# Altium PCB PCB_PCB恒温加热台 copy_2022-02-27.pcbdoc
Units mil, origin at the board's own origin, x right, y up, seen from the top; angles counter-clockwise.
Board outline 3955 x 4270 mil, 2 copper layers (Top Layer, Bottom Layer); 61 components, 53 nets, 212 pads, 100 vias.
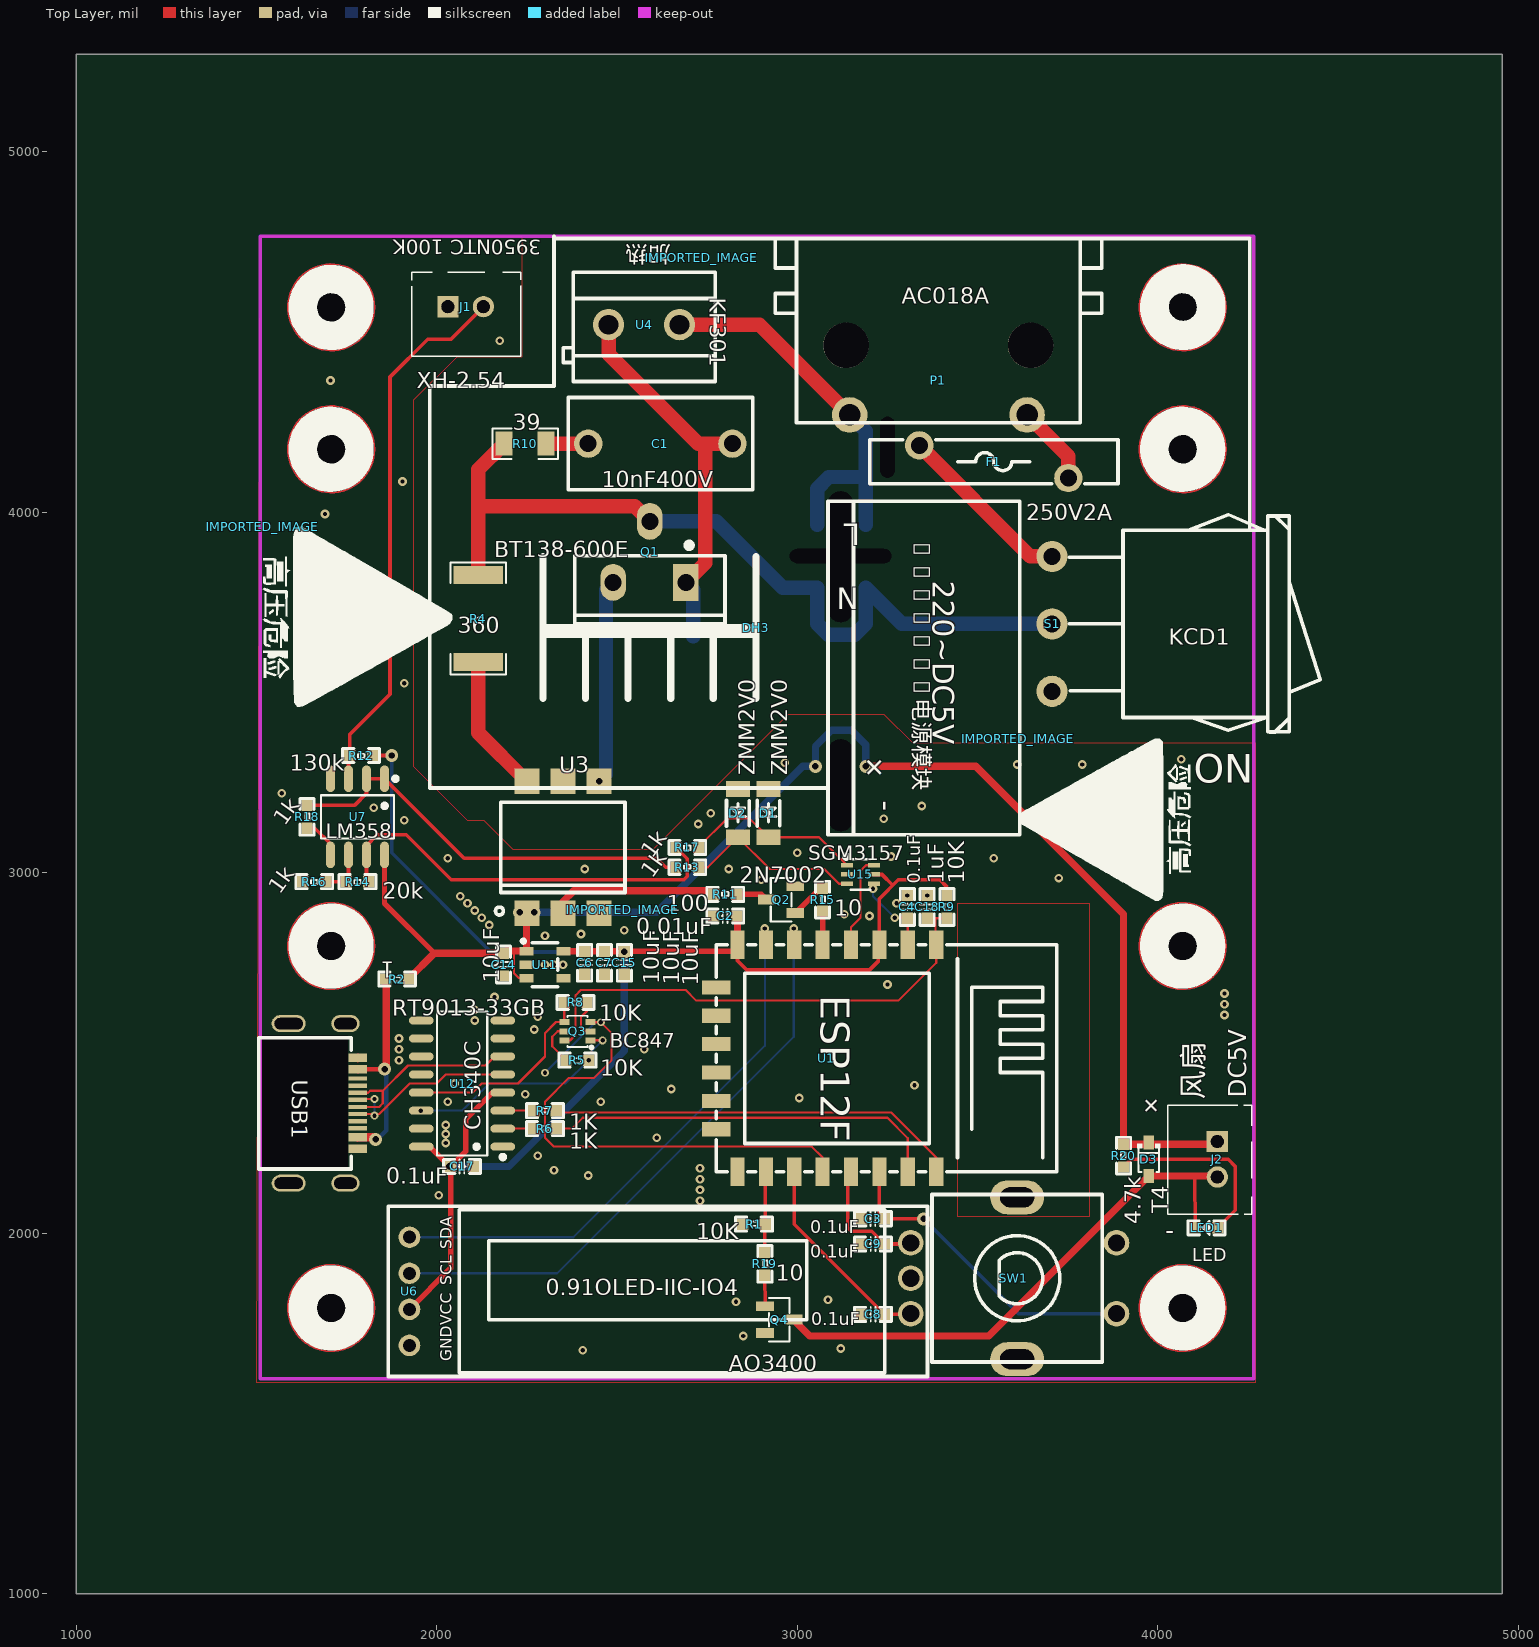
[diagram p0: Top Layer view]
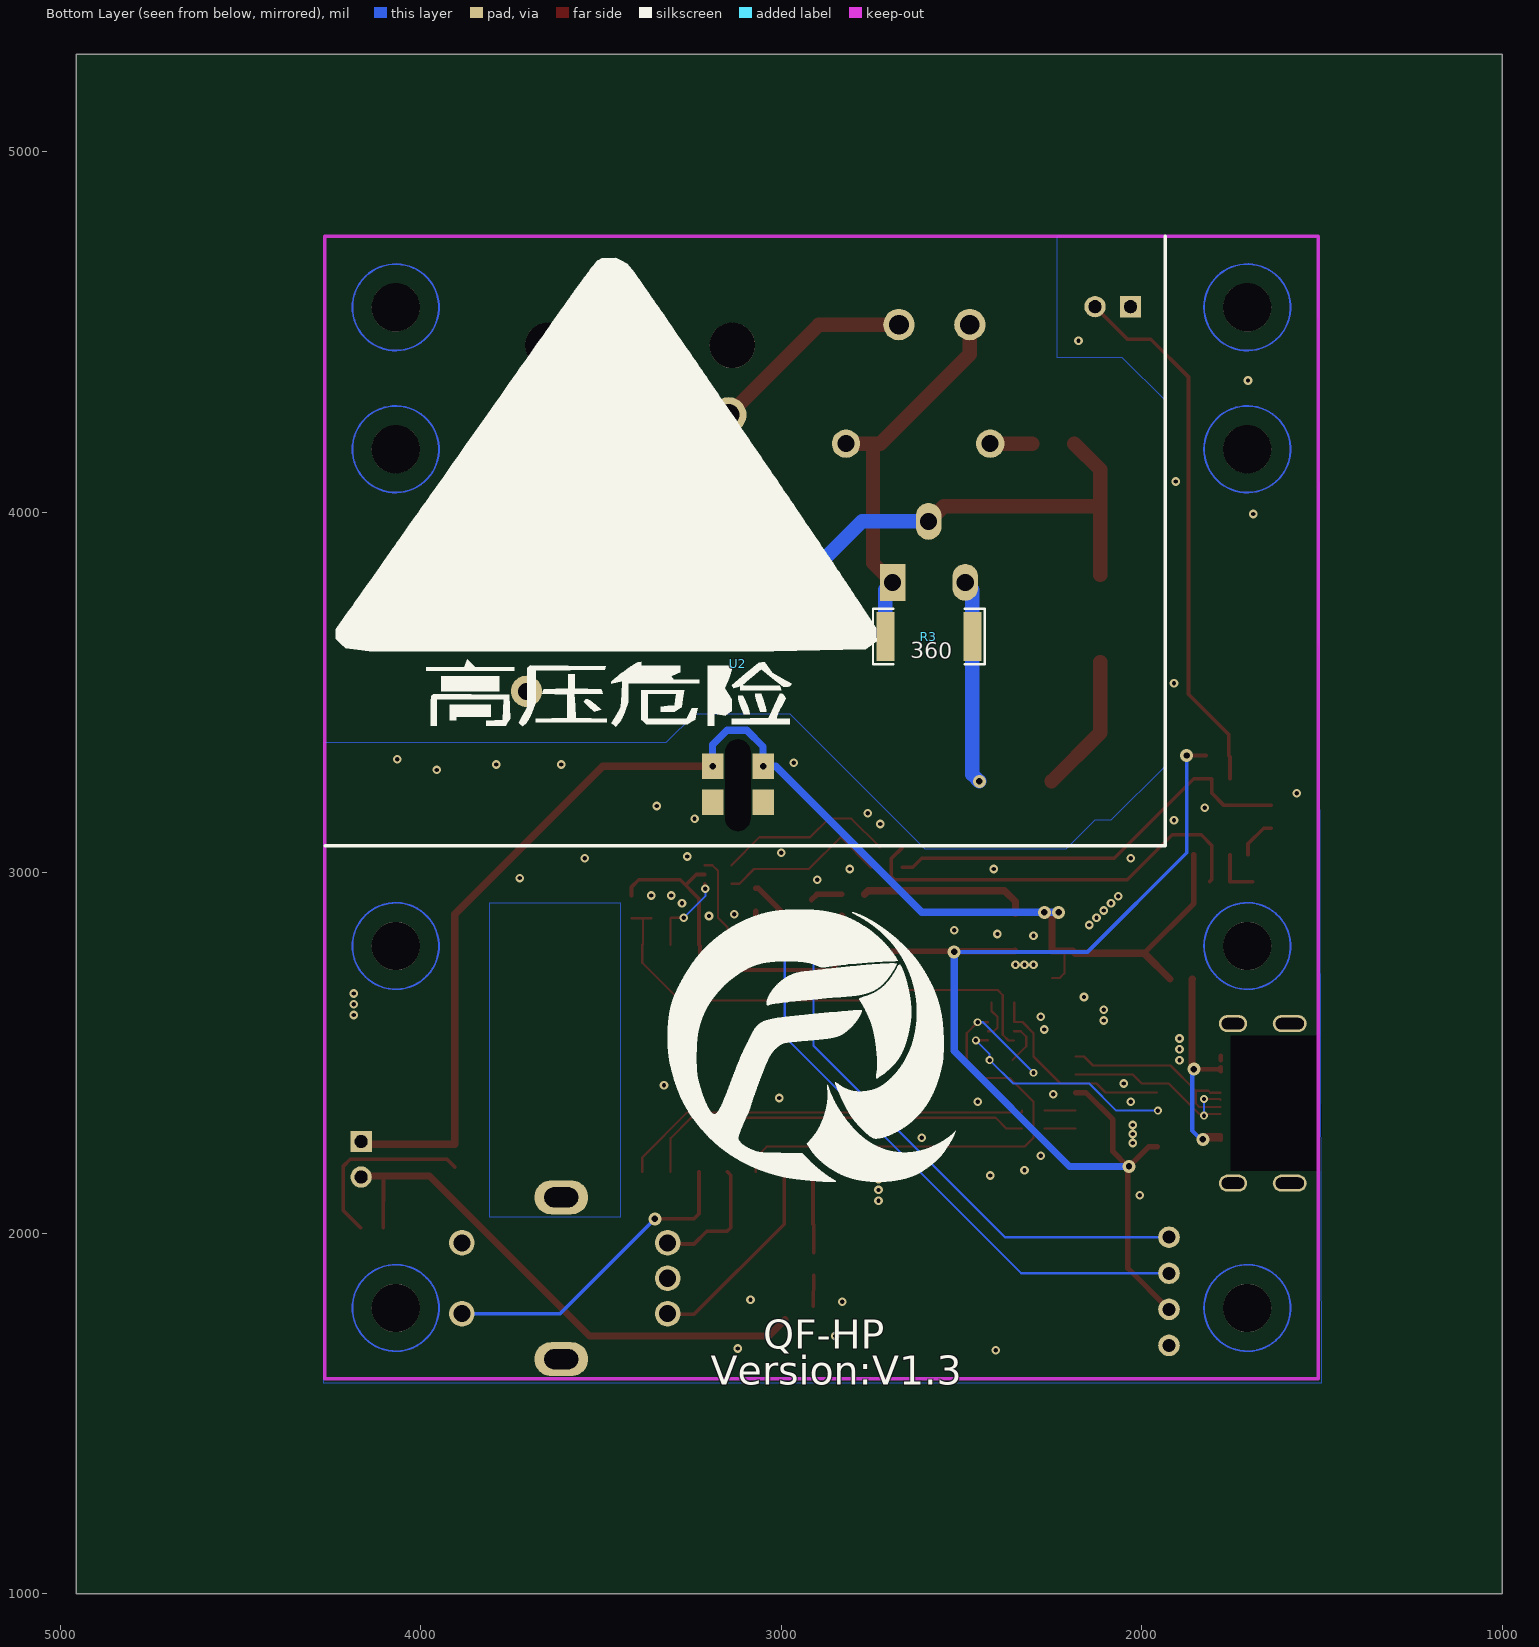
[diagram p1: Bottom Layer view, seen from below]

## Layer stack, top to bottom
Top Layer: signal copper (thickness not stored)
Dielectric: dielectric 12.6, FR-4, Dk 4.8
Bottom Layer: signal copper (thickness not stored)

## Board outline
4955,1000 1000,1000 1000,5270 4955,5270
cut-out: 3270,4245 3270,4115 cw(c3250,4115) 3230,4115 3230,4245 cw(c3250,4245) 3270,4245
cut-out: 2999,3898 3241,3898 cw(c3241,3878) 3241,3858 2999,3858 cw(c2999,3878) 2999,3898

## Components (designator, comment, footprint, x,y, rotation, side; value= is the part's Value field where it differs from the comment)
C1 "10nF400V" CAP-TH_L13.0-W6.5-P10.00-D1.2 2620,4190 r180 top
C2 "0.01uF" "CAP 0603" 2800,2880 r0 top
C3 "0.1uF" "CAP 0603" 3210,2040 r0 top
C4 "0.1uF" "CAP 0603" 3305,2905 r270 top
C6 "10uF" "CAP 0603" 2410,2750 r270 top
C7 "10uF" "CAP 0603" 2465,2750 r270 top
C8 "0.1uF" "CAP 0603" 3210,1775 r180 top
C9 "0.1uF" "CAP 0603" 3210,1970 r180 top
C14 "10uF" "CAP 0603" 2185.02,2744.96 r270 top
C15 "10uF" "CAP 0603" 2520,2750 r270 top
C17 "0.1uF" "CAP 0603" 2070,2185 r0 top
C18 "1uF" "CAP 0603" 3360,2905 r90 top
D1 "ZMM2V0" LL-34_L3.5-W1.5-RD 2920,3165 r90 top
D2 "ZMM2V0" LL-34_L3.5-W1.5-RD 2835,3165 r90 top
D3 "T4" SOD-323_L1.8-W1.3-LS2.5-RD 3975,2205 r270 top
DH3 "散热片无针" 散热片无针 2885,3680 r180 top
F1 "250V 2A 脚距10自恢复" FUSE-TH_L17.5-W3.1-P10.50-D0.8-S2.30 3545,4140 r180 top
IMPORTED_IMAGE "IMPORTED_IMAGE" IMPORTED_IMAGE 2515.11,2897.79 r0 top
IMPORTED_IMAGE "IMPORTED_IMAGE" IMPORTED_IMAGE 2735,4705 r0 top
IMPORTED_IMAGE "IMPORTED_IMAGE" IMPORTED_IMAGE 1517.6,3959.41 r0 top
IMPORTED_IMAGE "IMPORTED_IMAGE" IMPORTED_IMAGE 3612.68,3371.77 r0 top
J1 "XH-2.54" XH-2.54-TH-2P 2080,4570 r180 top
J2 "XH-2.54" XH-2.54-TH-2P 4165,2205 r90 top
LED1 "led-0603" LED-0603 4135,2015 r0 top
P1 "AC018A 8字电源侧插" 8字电源座侧插 3785,4760 r270 top
Q1 "BT138-600E" TO-220-3_L10.0-W4.5-P2.54-L 2590,3805 r180 top
Q2 "2N7002" SOT-23-3_L2.9-W1.3-P1.90-LS2.4-BR 2955,2925 r0 top
Q3 "BC847BS,115" SOT-363_L2.0-W1.3-P0.65-LS2.1-TL 2390,2560 r180 top
Q4 "AO3400" SOT-23-3_L2.9-W1.3-P1.90-LS2.4-BR 2950,1760 r180 top
R1 "10K" RES-0603 2880,2025 r180 top
R2 "1" RES-0603 1890,2705 r0 top
R3 "360" R2512#1 2590,3655 r0 bottom
R4 "360" R2512#2 2115,3705 r270 top
R5 "10K" RES-0603 2390,2480 r0 top
R6 "1K" RES-0603 2300,2290 r180 top
R7 "1K" RES-0603 2300,2340 r180 top
R8 "10K" RES-0603 2385,2640 r0 top
R9 "10K" RES-0603 3415,2905 r270 top
R10 "39" R1206 2245,4190 r180 top
R11 "100" RES-0603 2800,2940 r180 top
R12 "130k" RES-0603 1790,3325 r0 top
R13 "1k" RES-0603 2695,3015 r180 top
R14 "20k" RES-0603 1780,2975 r0 top
R15 "10" RES-0603 3070,2925 r90 top
R16 "1k" RES-0603 1660,2975 r0 top
R17 "1k" RES-0603 2695,3070 r0 top
R18 "1k" RES-0603 1640,3155 r90 top
R19 "10" RES-0603 2910,1915 r90 top
R20 "4.7k" RES-0603 3905,2215 r270 top
S1 "KCD1弯脚" 船型开关15-10 4305,3950 r270 top
SW1 "EC11" SW-TH_5P-L11.8-W12.0-P2.50-LS14.5 3600,1875 r270 top
U1 "ESP-12F(ESP8266MOD)" WIFIM-SMD_ESP-12F-ESP8266MOD 3080,2485 r180 top
U2 "5V700mA电源模块" 5V700MA 3085,4030 r0 top
U3 "MOC3041SR2M" SOP-6_L8.5-W6.4-P2.54-LS9.2-BL 2350,3070 r0 top
U4 "KF301-5.0-2P" CONN-TH_P5.00_KF301-5.0-2P 2575,4520 r180 top
U6 "0.91OLED-IIC-IO4" 0.91-OLED-IIC-12832 1865,2075 r0 top
U7 "LM358" SOP-8_L4.9-W3.9-P1.27-LS6.0-BL 1780,3155 r180 top
U11 "RT9013-33GB" SOT-23-5_L3.0-W1.7-P0.95-LS2.8-BR 2300,2745 r180 top
U12 "CH340C" SOP-16_L10.0-W3.9-P1.27-LS6.0-BL 2070,2415 r90 top
U15 "SGM3157" SC-70-6_L2.2-W1.3-P0.65-LS2.2-BR 3175,2995 r180 top
USB1 "TYPE-C-16M-005" USB-C-SMD_TYPE-C-16M-005 1685,2360 r270 top

## Footprints (in the part's own frame and the unit in brackets; to place one, negate y for a bottom-side part, rotate by r counter-clockwise, add the part's x,y. Pads: shape width x height; smd on the part's side, far side on the other; paste and mask are expansions set on the pad)
0.91-OLED-IIC-12832 [mil]
  round 60 hole 36: 1(59.06,-86.22) 2(59.06,-186.22) 3(59.06,-286.22) 4(59.06,-386.22)
  silkscreen extent 0,-472 1496,0
5V700MA [mil]
  rect 60x118.11 smd far side: 1(-30,-65) 1(105,-65) 2(-30,-240) 2(105,-240)
  rect 60x70.87 smd far side: 3(-35,-835) 3(105,-835) 4(-35,-735) 4(105,-735)
  Multi-Layer board cut-out: 70.43,-7.5 70.43,-300 66.92,-315.37 57.09,-327.7 42.88,-334.54 27.12,-334.54 12.91,-327.7 3.08,-315.37 -0.43,-300 -0.43,-300 -0.43,-7.5 3.08,7.87 12.91,20.2 27.12,27.04 42.88,27.04 57.09,20.2 66.92,7.87 70.43,-7.5 70.43,-7.5
  Multi-Layer board cut-out: -0.43,-880 -0.43,-695 3.08,-679.63 12.91,-667.3 27.12,-660.46 42.88,-660.46 57.09,-667.3 66.92,-679.63 70.43,-695 70.43,-695 70.43,-880 66.92,-895.37 57.09,-907.7 42.88,-914.54 27.12,-914.54 12.91,-907.7 3.08,-895.37 -0.43,-880 -0.43,-880
  silkscreen extent 0,-925 532,0
8字电源座侧插 [mm]
  round 2.5 hole 1.5: 1(12.45,-3.75) 2(12.45,-16.25)
  round 3.2 hole 3.2 unplated: ""(7.55,-3.5) ""(7.55,-16.5)
  silkscreen extent 0,-21.5 13,1.5
"CAP 0603" [mm]
  rect 0.8x0.8 smd: 1(-0.8,0) 2(0.8,0)
  silkscreen extent -1.3,-0.51 1.3,0.51
CAP-TH_L13.0-W6.5-P10.00-D1.2 [mm]
  round 2 hole 1.2: 1(-5.08,0) 2(5.08,0)
  silkscreen extent -6.5,-3.25 6.5,3.25
CONN-TH_P5.00_KF301-5.0-2P [mm]
  round 2.2 hole 1.4: 1(-2.5,0) 2(2.5,0)
  silkscreen extent -5,-3.7 5.71,4
FUSE-TH_L17.5-W3.1-P10.50-D0.8-S2.30 [mm]
  round 2 hole 1.2: 1(-5.25,1.15) 2(5.25,-1.15)
  silkscreen extent -8.75,-1.55 8.75,1.55
IMPORTED_IMAGE [mil]
LED-0603 [mm]
  rect 0.8x0.8 smd: 1(-0.8,0) 2(0.8,0)
  silkscreen extent -1.3,-0.5 1.3,0.5
LL-34_L3.5-W1.5-RD [mm]
  rect 1.1x1.7 smd: 1(-1.7,0) 2(1.7,0)
  silkscreen extent -0.9,-0.8 0.9,0.8
R1206 [mil]
  rect 47.54x66.97 smd: 1(-58.22,0) 2(58.22,0)
  silkscreen extent -91,-42 91,42
R2512#1 [mil]
  rect 50.49x136.06 smd: 1(120.72,0) 2(-120.72,0)
  silkscreen extent -155,-77 155,77
R2512#2 [mil]
  rect 50.49x136.06 smd: 1(-120.72,0) 2(120.72,0)
  silkscreen extent -155,-77 155,77
RES-0603 [mm]
  rect 0.8x0.8 smd: 1(-0.8,0) 2(0.8,0)
  silkscreen extent -1.3,-0.5 1.3,0.5
SC-70-6_L2.2-W1.3-P0.65-LS2.2-BR [mm]
  rect 0.841x0.315 smd: 1(0.945,-0.65) 2(0.945,0) 3(0.945,0.65) 4(-0.945,0.65) 5(-0.945,0) 6(-0.945,-0.65)
  silkscreen extent -0.7,-1.41 1.15,1.08
SOD-323_L1.8-W1.3-LS2.5-RD [mm]
  rect 1x0.75 smd: 1(-1.173,0) 2(1.173,0)
  silkscreen extent -1.08,-0.8 0.9,0.8
SOP-6_L8.5-W6.4-P2.54-LS9.2-BL [mil]
  rect 70.1x70.87 smd: 1(-100,-183) 2(0,-183) 3(100,-183) 4(100,183) 5(0,183) 6(-100,183)
  silkscreen extent -187,-187 172,125
SOP-8_L4.9-W3.9-P1.27-LS6.0-BL [mm]
  oval 0.63x1.865 smd: 1(-1.905,-2.682) 2(-0.635,-2.682) 3(0.635,-2.682) 4(1.905,-2.682) 5(1.905,2.682) 6(0.635,2.682) 7(-0.635,2.682) 8(-1.905,2.682)
  silkscreen extent -2.82,-2.83 2.58,1.52
SOP-16_L10.0-W3.9-P1.27-LS6.0-BL [mm]
  oval 0.56x1.745 smd: 1(-4.445,-2.873) 2(-3.175,-2.873) 3(-1.905,-2.873) 4(-0.635,-2.873) 5(0.635,-2.873) 6(1.905,-2.873) 7(3.175,-2.873) 8(4.445,-2.873) 9(4.445,2.873) 10(3.175,2.873) 11(1.905,2.873) 12(0.635,2.873) 13(-0.635,2.873) 14(-1.905,2.873) 15(-3.175,2.873) 16(-4.445,2.873)
  silkscreen extent -5.33,-3.02 5.08,1.77
SOT-23-3_L2.9-W1.3-P1.90-LS2.4-BR [mm]
  rect 1.25x0.7 smd: 1(1,-0.95) 2(1,0.95) 3(-1,0)
  silkscreen extent -0.73,-1.53 0.73,1.53
SOT-23-5_L3.0-W1.7-P0.95-LS2.8-BR [mm]
  rect 1x0.6 smd: 1(1.3,-0.95) 2(1.3,0) 3(1.3,0.95) 4(-1.3,0.95) 5(-1.3,-0.95)
  silkscreen extent -0.9,-1.78 1.65,1.55
SOT-363_L2.0-W1.3-P0.65-LS2.1-TL [mm]
  rect 0.7x0.42 smd: 1(-0.92,0.65) 2(-0.92,0) 3(-0.92,-0.65) 4(0.92,-0.65) 5(0.92,0) 6(0.92,0.65)
  silkscreen extent -1.09,-1.1 0.7,1.24
SW-TH_5P-L11.8-W12.0-P2.50-LS14.5 [mm]
  round 1.8 hole 1.2: 1(-2.5,-7.25) 2(0,-7.25) 3(2.5,-7.25) 4(-2.5,7.25) 5(2.5,7.25)
  oval 2.4x3.8 hole 1.4 slot 2.4 at 90 deg: 7(-5.7,0.25) 8(5.7,0.25)
  silkscreen extent -5.9,-5.75 5.9,6.25
TO-220-3_L10.0-W4.5-P2.54-L [mm]
  rect 1.8x2.6 hole 1.2: 1(-2.56,0.005)
  oval 1.8x2.6 hole 1.2: 2(-0.02,-4.305) 3(2.56,-0.005)
  silkscreen extent -5.32,-2.82 5.28,2.9
USB-C-SMD_TYPE-C-16M-005 [mm]
  oval 1.2x2 hole 0.8 slot 1.6 at 90 deg: 17(5.62,1.563) 20(-5.62,1.563)
  oval 1.2x2.4 hole 0.8 slot 2 at 90 deg: 18(5.62,-2.437) 19(-5.62,-2.437)
  rect 0.3x1.3 smd: A1(-3.35,2.438) A4(-2.55,2.438) A5(-1.25,2.438) A6(-0.25,2.438) A7(0.25,2.438) A8(1.25,2.438) A9(2.55,2.438) A12(3.35,2.438) B1(3.05,2.438) B4(2.25,2.438) B5(1.75,2.438) B6(0.75,2.438) B7(-0.75,2.438) B8(-1.75,2.438) B9(-2.25,2.438) B12(-3.05,2.438)
  Keep-Out Layer lines w0.254: 4.7,-4.45 -4.65,-4.45
  Multi-Layer board cut-out: -4.75,-4.612 -4.75,1.738 4.75,1.738 4.75,-4.662
  silkscreen extent -4.62,-4.54 4.62,1.96
WIFIM-SMD_ESP-12F-ESP8266MOD [mm]
  rect 1x2 smd: 1(-7.751,-8.002) 2(-5.751,-8.002) 3(-3.751,-8.002) 4(-1.751,-8.002) 5(0.249,-8.002) 6(2.249,-8.002) 7(4.249,-8.002) 8(6.249,-8.001) 9(6.249,7.999) 10(4.249,8) 11(2.249,8.002) 12(0.249,8.001) 13(-1.751,8) 14(-3.751,8.001) 15(-5.751,8) 16(-7.751,8.001)
  rect 2x1 smd: 17(7.75,-5) 18(7.749,-3.002) 19(7.749,-1.003) 20(7.749,0.998) 21(7.749,2.997) 22(7.75,4.997)
  silkscreen extent -16.25,-8 7.75,8
XH-2.54-TH-2P [mil]
  round 59.06 hole 35.44 slot 35.64 at 0 deg: 1(-49.22,0)
  rect 59.05x59.05 hole 35.44 slot 35.64 at 0 deg: 2(49.22,0)
  silkscreen extent -152,-95 149,138
散热片无针 [mil]
  silkscreen extent 0,-197 590,197
船型开关15-10 [mm]
  round 2.2 hole 1.2: 1(1.85,-15.2) 2(6.6,-15.2) 3(11.35,-15.2)
  silkscreen extent -1.1,-13.97 14.22,3.68

## Free pads (board coordinates)
  round 133.86 hole 133.86 unplated: ""(1706.85,1792.56) ""(1706.85,2796.5) ""(1706.85,4174.45) ""(1706.85,4568.15) ""(4069.06,1792.56) ""(4069.06,2796.5) ""(4069.06,4174.45) ""(4069.06,4568.15)

## Via types
v1: diameter 24, hole 12, Top Layer to Bottom Layer, tented both sides, 82 vias
v2: diameter 36, hole 18, Top Layer to Bottom Layer, tented both sides, 11 vias
v3: diameter 22, hole 12, Top Layer to Bottom Layer, tented both sides, 7 vias

## Nets (pads, with @x,y where several pads share a name; then routed paths per layer and width w, separated by ;. In a path a pad name is that pad's centre, name@x,y a point inside that pad or via, vN(x,y) a via of type N, cw(c..) or ccw(c..) an arc to the next point about the centre after c; other vN are vias at no path point)
3.3V: C2.2 C6.1 C7.1 C15.1 C17.1 R9.1 R12.2 U1.3 U1.8 U6.3 U11.5 U12.4 U12.16 U15.5 | length 4308.2
  Top Layer w10: R12.2 v2(1875,3325) ; U1.8 2834,2756 2860,2730 3200,2730 3225,2755 3225,2797.4 U1.3 3227.7,2927.7 3280,2980 3395,2980 3415,2960 R9.1 ; U15.5 3235.06,2995 3265.03,2965.03
  Top Layer w15: U6.3 2038.5,1903.22 C17.1 2080,2226.5 2080,2315 2155,2390 U12.4 ; U12.16 1980,2240 v2(2035,2185) ; C15.1 2815.47,2781.5 U1.8
  Top Layer w20: U11.5 C15.1 ; C2.2 2833.96,2877.54 U1.8
  Bottom Layer w10: v2(1875,3325) 1875,3055 2150,2780 v2(2520,2780)
  Bottom Layer w20: v2(2035,2185) 2200,2185 2520,2505 v2(2520,2780)
+5V: C14.1 D3.1 J2.2 R2.2 R20.1 U2.4 U3.1 U7.8 U11.1 U11.3 | length 3984.4
  Top Layer w6: 2214.34,2782.4 2214.34,2720.66 2227.4,2707.6 U11.3
  Top Layer w15: U7.8 1855,2914.4 1993,2776.5
  Top Layer w20: R2.2 1992.95,2776.45 C14.1 ; C14.1 2190.9,2782.4 U11.1 2248.8,2890 v2(2270,2890) ; v2(3190,3295) 3495,3295 3905,2885 R20.1 4157.27,2246.5 J2.2
  Bottom Layer w20: v2(2230,2890) v2(2270,2890) 2610,2890 3015,3295 v2(3050,3295) 3050,3350 3095,3395 3150,3395 3190,3355 v2(3190,3295)
ADC: C4.2 U1.2 U15.4 | length 230.7
  Top Layer w6: v1(3270,2875) 3305,2875 3306.4,2873.6 U1.2
  Top Layer w10: v1(3210,2955) 3212.22,2957.22 U15.4
  Bottom Layer w6: v1(3210,2955) 3210,2935 v1(3270,2875)
ADC0: D2.1 R13.1 U15.3 | length 499
  Top Layer w6: R13.1 2751.93,3015 D2.1 2923.07,3010 3075,3010 3115.59,2969.41 U15.3
ADC1: D1.1 R17.2 U15.1 | length 498.9
  Top Layer w6: R17.2 2726.5,3071.5 2805,3150 2868.07,3150 D1.1 3060.3,3098.07 U15.1
D+: U12.5 USB1.A6 USB1.B6 | length 558.5
  Top Layer w6: USB1.A6 1783.12,2372 v3(1827,2372) ; USB1.B6 1840.5,2330.5 1925,2415 2000,2415 2025,2440 U12.5 U12.5@2165,2440
  Bottom Layer w6: v3(1827,2326) v3(1827,2372)
D-: U12.6 USB1.A7 USB1.B7 | length 551.8
  Top Layer w6: USB1.A7 1840.2,2350.2 1850,2360 1850,2395 ; USB1.B7 1809.5,2389.5 1815,2395 1835,2395 1850,2395 ; U12.6 2160,2490 2135,2465 1920,2465 1850,2395
DTR: Q3.4 R8.1 U12.13 | length 570.5
  Top Layer w6: U12.13 2100,2390 2125,2415 2225,2415 2300,2490 2300,2555 2330.6,2585.6 Q3.4 2353.5,2585.87 R8.1
F1_2: F1.2 S1.1 | length 495.9
  Top Layer w40: F1.2 3646.42,3877.16 S1.1
FAN: R1.1 R19.2 U1.10 | length 224.6
  Top Layer w10: R19.2 2909.99,2023.49 R1.1 2911.5,2168.83 U1.10
GND: C2.1 C3.1 C4.1 C6.2 C7.2 C8.2 C9.2 C14.2 C15.2 C17.2 C18.2 D1.2 D2.2 J1.2 Q2.2 Q4.2 R1.2 R16.1 SW1.2 SW1.4 U1.9 U2.3 U6.4 U7.4 U11.2 U12.1 U15.2 USB1.17 USB1.18 USB1.19 USB1.20 USB1.A1 USB1.A12 USB1.B1 USB1.B12 | length 11.8
  Top Layer w12: USB1.B12 USB1.A1
  other v1: 2405,1675 3120,1680 2850,1715 2830,1810 3085,1815 2730,2090 2005,2105 2730,2120 2730,2150 2420,2160 2325,2175 2730,2180 2280,2215 2025,2250 2610,2265 2025,2275 2025,2300 2030,2365 2455,2365 3005,2375 2245,2385 2650,2400 3325,2410 2050,2415 1895,2480 1895,2510 2575,2510 1895,2540 2270,2565 2105,2590 2280,2600 4185,2605 2105,2620 4185,2635 2160,2655 4185,2665 3250,2690 2300,2745 2325,2745 2350,2745 2300,2825 2400,2830 2520,2840 2145,2855 2125,2875 3200,2880 3130,2885 2105,2895 2085,2915 3275,2915 2065,2935 3305,2936.5 3360,2936.5 2900,2980 3725,2985 2410,3010 2810,3010 2030,3040 3545,3040 3260,3045 3000,3055 2725,3135 1910,3145 3240,3150 2760,3165 1825,3180 3345,3185 1570,3220 3955,3285 3610,3300 3790,3300 2965,3305 4065,3315 1910,3525 1690,3995 1905,4085 1705,4365 2175,4475
IO0: Q3.3 U1.12 | length 1524.9
  Top Layer w6: Q3.3 2426.81,2585 v3(2455,2585) 2485,2555 2485,2480 2435,2430 2365,2430 2300,2365 2300,2265 2325,2240 3040,2240 3070.2,2209.8 U1.12
  Bottom Layer w6: v3(2300,2445) 2440,2585 v3(2455,2585)
L: Q1.2 R4.1 R10.2 S1.2 U2.2 | length 2345.7
  Top Layer w40: R4.1 2115,4118.22 R10.2 ; 2115,4016.34 2548.93,4016.34 Q1.2
  Bottom Layer w40: Q1.2 2775.5,3974.5 2960,3790 3055,3790 3055,3690 3085,3660 3160,3660 3190,3690 3190,3790 3290,3690 3706.41,3690 S1.2
LED1_2: LED1.2 R20.2 | length 517.3
  Top Layer w10: R20.2 3926.5,2205 4195,2205 4215,2185 4215,2063.5 LED1.2
N: P1.2 U2.1 U4.1 | length 1147.3
  Top Layer w40: U4.1 2895.1,4520 P1.2@3140.2,4274.8
  Bottom Layer w40: U2.1@3055,3965 3055,4065 3087.41,4097.41 3190,4097.41 ; P1.2@3140.24,4274.84 3190,4225.08 U2.1@3190,3965
P1_1: F1.1 P1.1 | length 229.6
  Top Layer w40: P1.1@3632.36,4274.84 3751.7,4155.5 F1.1
PWM: R15.1 U1.5 | length 93.5
  Top Layer w15: R15.1 U1.5
Q1_1: C1.1 Q1.1 R3.1 U4.2 | length 1168.6
  Top Layer w40: U4.2 2476.6,4438.4 2725,4190 C1.1 2745,4190 2745,3859 Q1.1
  Bottom Layer w40: Q1.1 2710.72,3784.87 R3.1
Q1_3: Q1.3 R3.2 U3.4 | length 568.4
  Bottom Layer w40: v2(2450,3253) 2469.28,3272.28 R3.2 2469.28,3785.26 Q1.3
Q2_1: Q2.1 R15.2 | length 104.2
  Top Layer w15: Q2.1 3063.27,2956.5 R15.2
Q3_2: Q3.2 R8.2 | length 107.2
  Top Layer w6: R8.2 2416.5,2616.5 2400,2600 2400,2570 2410,2560 Q3.2
Q3_5: Q3.5 R5.1 | length 121
  Top Layer w6: Q3.5 2335,2560 2320,2545 2320,2518.5 R5.1
Q4_1: Q4.1 R19.1 | length 86.1
  Top Layer w10: R19.1 Q4.1
Q4_3: D3.2 J2.1 LED1.1 Q4.3 | length 1523.2
  Top Layer w10: 4102.9,2158.8 LED1.1
  Top Layer w20: Q4.3 3034.37,1715 3531.16,1715 D3.2 4161.94,2158.84 J2.1
R10_1: C1.2 R10.1 | length 116.8
  Top Layer w40: R10.1 C1.2
R11_1: Q2.3 R11.1 | length 90.3
  Top Layer w15: R11.1 2900.64,2939.99 Q2.3
R12_1: J1.1 R12.1 U7.3 | length 1502
  Top Layer w10: U7.3 1755,3321.5 R12.1 1758.5,3383.5 1870,3495 1870,4375 1975,4480 2039.23,4480 J1.1
R13_2: R13.2 R18.2 U7.1 U7.2 | length 1179.7
  Top Layer w10: R18.2 1771.5,3186.5 1805,3220 U7.2 U7.1 2075.6,3040 2610,3040 2635,3015 R13.2
RST: C18.1 Q3.6 R9.2 U1.1 | length 1389.3
  Top Layer w6: Q3.6 2369.4,2534.4 2385,2550 2385,2660 2400,2675 2690,2675 2720,2645 3280,2645 3385.2,2750.2 U1.1@3385.2,2800 ; C18.1 R9.2 ; 3382.89,2873.5 3382.89,2802.27 U1.1
RTS: Q3.1 R5.2 U12.14 | length 629.5
  Top Layer w6: Q3.1 2426.81,2535 v3(2460,2535)
  Bottom Layer w6: v3(1955,2340) 2070,2340 2145,2415 2356.5,2415 v3(2421.5,2480) 2421.5,2496.5 v3(2460,2535)
RXD0: R6.1 U1.15 | length 1104.3
  Top Layer w6: R6.1 2375,2290 2405,2320 3250,2320 3306.4,2263.6 U1.15
S$4044: 
S$4046: 
S$4048: 
S$4055: 
S$4057: 
S$4070: 
S$4080: 
SCL: U1.6 U6.2 | length 1683.3
  Top Layer w6: v1(2990,2845) 2991.44,2843.56 U1.6
  Bottom Layer w6: U6.2 2333.78,1888.78 2990,2545 v1(2990,2845)
SDA: U1.7 U6.1 | length 1577.1
  Top Layer w6: v1(2910,2845) 2912.7,2842.3 U1.7
  Bottom Layer w6: U6.1 2378.78,1988.78 2910,2520 v1(2910,2845)
SW: C3.2 SW1.5 U1.14 | length 888.8
  Top Layer w10: U1.14 3227.66,2053.84 C3.2 v2(3350,2040)
  Bottom Layer w10: v2(3350,2040) 3613.43,1776.57 SW1.5
SWA: C9.1 SW1.1 U1.13 | length 353.3
  Top Layer w10: U1.13 3140,2161.1 3140,2015 3150,2005 3206.5,2005 C9.1 3311.15,1970 SW1.1
SWB: C8.1 SW1.3 U1.11 | length 572.3
  Top Layer w10: U1.11 2991.44,2025.06 C8.1 3313,1775 SW1.3
SWITCH: U1.4 U15.6 | length 259.5
  Top Layer w6: U1.4 3148.9,2848.9 3175,2875 3175,3005 3190.6,3020.6 U15.6
TXD0: R7.1 U1.16 | length 1150.4
  Top Layer w6: R7.1 2331.5,2335 3260,2335 3385.2,2209.8 U1.16@3385.2,2170
U3_2: R11.2 U3.2 | length 468.1
  Top Layer w20: U3.2 2350,2920 2380,2950 2758.5,2950 R11.2
U3_6: R4.2 U3.6 | length 387.2
  Top Layer w40: R4.2 2115,3388 U3.6
U7_5: R18.1 U7.5 | length 113.6
  Top Layer w10: R18.1 1661.5,3123.5 1705,3080 U7.5
U7_6: R14.1 R16.2 U7.6 | length 137.9
  Top Layer w10: R16.2 R14.1 1755,2975 U7.6
U7_7: R14.2 R17.1 U7.7 | length 1154.1
  Top Layer w10: R14.2 1805,2981.51 U7.7 1805,3075 1835,3105 1915,3105 2040,2980 2685,2980 2695,2990 2695,3038.5 R17.1
U12_2: R6.2 U12.2 | length 85.4
  Top Layer w6: U12.2 R6.2
U12_3: R7.2 U12.3 | length 85.4
  Top Layer w6: U12.3 R7.2
VCC: R2.1 USB1.A4 USB1.A9 USB1.B4 USB1.B9 | length 742.3
  Top Layer w12: v2@1823.58,2271.42 USB1.B4 USB1.A9 1781.37,2260 v2@1835,2260 ; USB1.B9 USB1.A4 1786.36,2455 1860,2455 1787.38,2455 USB1.B9
  Top Layer w20: v2(1855,2455) 1860,2460 1860,2705 R2.1
  Bottom Layer w12: v2@1835,2260 1860,2285 v2@1860,2455
  other v2: 1830,2260
pads on no net: P1. S1.3 SW1.7 SW1.8 U1.17 U1.18 U1.19 U1.20 U1.21 U1.22 U3.3 U3.5 U11.4 U12.7 U12.8 U12.9 U12.10 U12.11 U12.12 U12.15 USB1.A5 USB1.A8 USB1.B5 USB1.B8
copper on no net: | length 12063.7
  Top Layer w5: 1826.85,1792.56 ccw(c1706.85,1792.56) 1826.85,1792.56 ; 1826.85,2796.5 ccw(c1706.85,2796.5) 1826.85,2796.5 ; 1826.85,4174.45 ccw(c1706.85,4174.45) 1826.85,4174.45 ; 1826.85,4568.15 ccw(c1706.85,4568.15) 1826.85,4568.15 ; 4189.06,1792.56 ccw(c4069.06,1792.56) 4189.06,1792.56 ; 4189.06,2796.5 ccw(c4069.06,2796.5) 4189.06,2796.5 ; 4189.06,4174.45 ccw(c4069.06,4174.45) 4189.06,4174.45 ; 4189.06,4568.15 ccw(c4069.06,4568.15) 4189.06,4568.15
  Bottom Layer w5: 1826.85,1792.56 ccw(c1706.85,1792.56) 1826.85,1792.56 ; 1826.85,2796.5 ccw(c1706.85,2796.5) 1826.85,2796.5 ; 1826.85,4174.45 ccw(c1706.85,4174.45) 1826.85,4174.45 ; 1826.85,4568.15 ccw(c1706.85,4568.15) 1826.85,4568.15 ; 4189.06,1792.56 ccw(c4069.06,1792.56) 4189.06,1792.56 ; 4189.06,2796.5 ccw(c4069.06,2796.5) 4189.06,2796.5 ; 4189.06,4174.45 ccw(c4069.06,4174.45) 4189.06,4174.45 ; 4189.06,4568.15 ccw(c4069.06,4568.15) 4189.06,4568.15

## Polygon pours and split planes (outlines as drawn)
VCC on Bottom Layer (solid): 3445,2915 3810,2915 3810,2045 3445,2045 3445,2150
GND on Bottom Layer (solid): 1510,4765 2235,4765 2235,4430 2055,4430 1935,4310 1935,3295 2085,3145 2130,3145 2210,3065 2600,3065 2975,3440 3240,3440 3320,3360 4270,3360 4270,1585 1500,1585
VCC on Top Layer (solid): 3445,2915 3810,2915 3810,2045 3445,2045 3445,2150
GND on Top Layer (solid): 1510,4765 2235,4765 2235,4430 2055,4430 1935,4310 1935,3295 2085,3145 2130,3145 2210,3065 2600,3065 2975,3440 3240,3440 3320,3360 4270,3360 4270,1585 1500,1585

## Silkscreen, mask and mechanical layers (free items; w line width, h text height)
Top Overlay:
  circle w78.74: c4069.06,1792.56 r78.74
  circle w78.74: c1706.85,1792.56 r78.74
  circle w78.74: c1706.85,4568.15 r78.74
  circle w78.74: c4069.06,4568.15 r78.74
  circle w78.74: c1706.85,4174.45 r78.74
  circle w78.74: c4069.06,4174.45 r78.74
  circle w78.74: c1706.85,2796.5 r78.74
  circle w78.74: c4069.06,2796.5 r78.74
  lines w10 net S$4044: 2325,4350 2325,4765
  lines w10 net S$4046: 1980,3765 1980,3235 2585,3235 3085,3235 3085,3104.9 3225,3104.9
  lines w10 net S$4048: 3225,3104.92 3616.5,3104.92
  lines w10 net S$4055: 4255,3955 4255,4750
  lines w10 net S$4057: 2325,4759.15 4255,4759.15 4255,4738.12
  lines w10 net S$4070: 1980,3765 1980,4350 2325,4350
  lines w78.74: 3991.26,4570 cw(c4070,4570) 4148.74,4570 cw(c4070,4570) 3991.26,4570
  text "3950NTC 100K" at 2289,4756 h40 r180
  text "加热" at 2650,4753 h80 r180
  text "KF301" at 2757.5,4595 h45 r270
  text "AC018A" at 3290,4577.5 h45
  text "250V2A" at 3635,3977.5 h45
  text "KCD1" at 4030,3632.5 h45
  text "ON" at 4098.9,3250.04 h78.74
  text "BC847" at 2480,2515 h40
  text "+" at 3987.32,2387.68 h50 r225
  text "DC5V" at 4245,2375 h50 r90
  text "风扇" at 4145,2370 h100 r90
  text "-" at 4045,2020 h50 r180
  text "LED" at 4095,1922.5 h35
Bottom Overlay:
  lines w10 net S$4080: 1935,4765 1935,3075 4265,3075
  text "QF-HP" at 3050,1680 h80
  text "Version:V1.3" at 3195,1580 h80

## Text inside footprints (layer, text, board x,y; h text height)
U1: Top Overlay "ESP12F" at 3065,2660 h80 r270
U2: Top Overlay "L" at 3175,3967.42 h59.84 r180; Top Overlay "N" at 3170,3789.92 h59.84 r180; Top Overlay "+" at 3256.16,3286.16 h59.84 r135; Top Overlay "-" at 3264.92,3170 h59.84 r90; Top Overlay "220~DC5V" at 3375.08,3810 h59.84 r270
U6: Top Overlay "SDA" at 2040.75,1955 h31.5 r90; Top Overlay "SCL" at 2040.75,1855 h31.5 r90; Top Overlay "VCC" at 2040.75,1745 h31.5 r90; Top Overlay "GND" at 2040.75,1645 h31.5 r90